# Altium PCB MB1137.PcbDoc
Units mil, origin at the board's own origin, x right, y up, seen from the top; angles counter-clockwise.
Board outline 6267 x 8240 mil, 6 copper layers (Top Layer, GND, Signal, PWR, GND (Mid2), Bottom Layer), stack 74.545 mil thick; 39 components, 109 nets, 405 pads, 144 vias.
Unrouted connection lines stored in the file: 3.
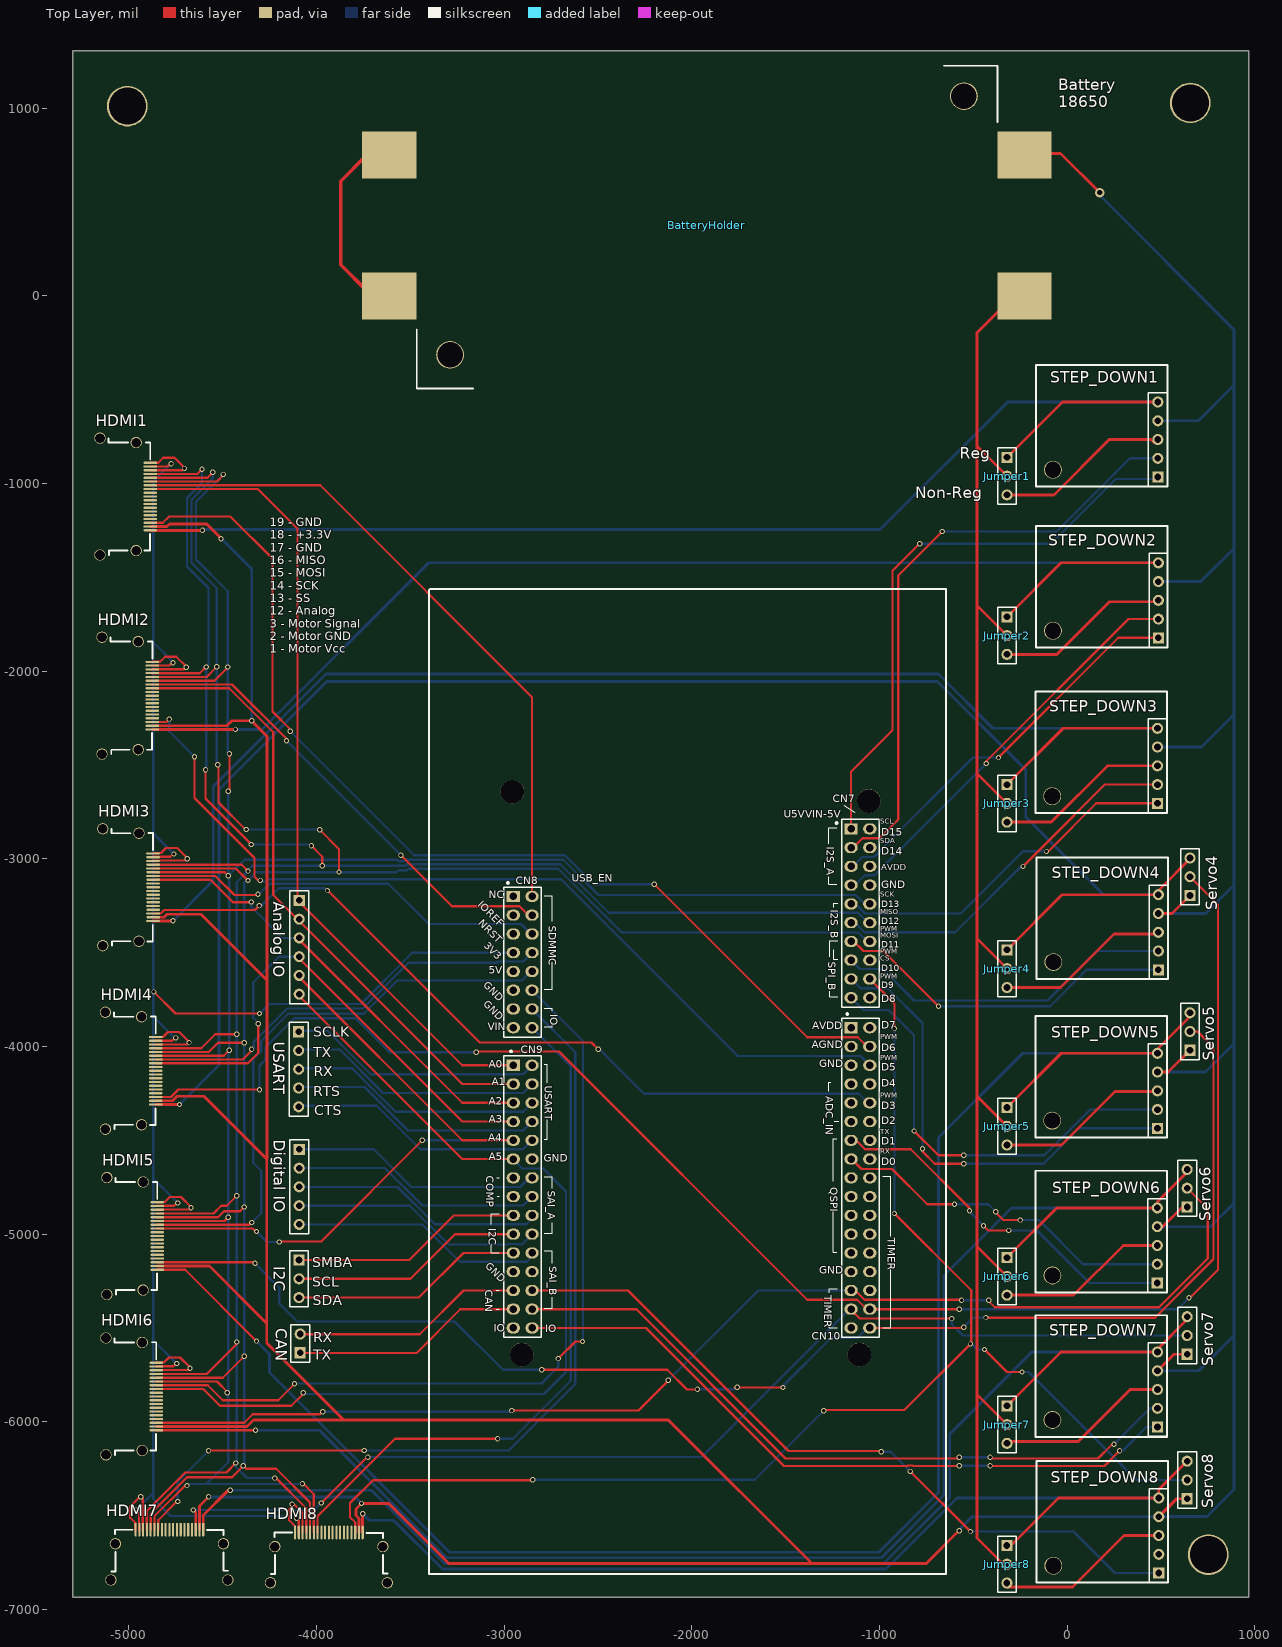
[diagram p0: Top Layer view]
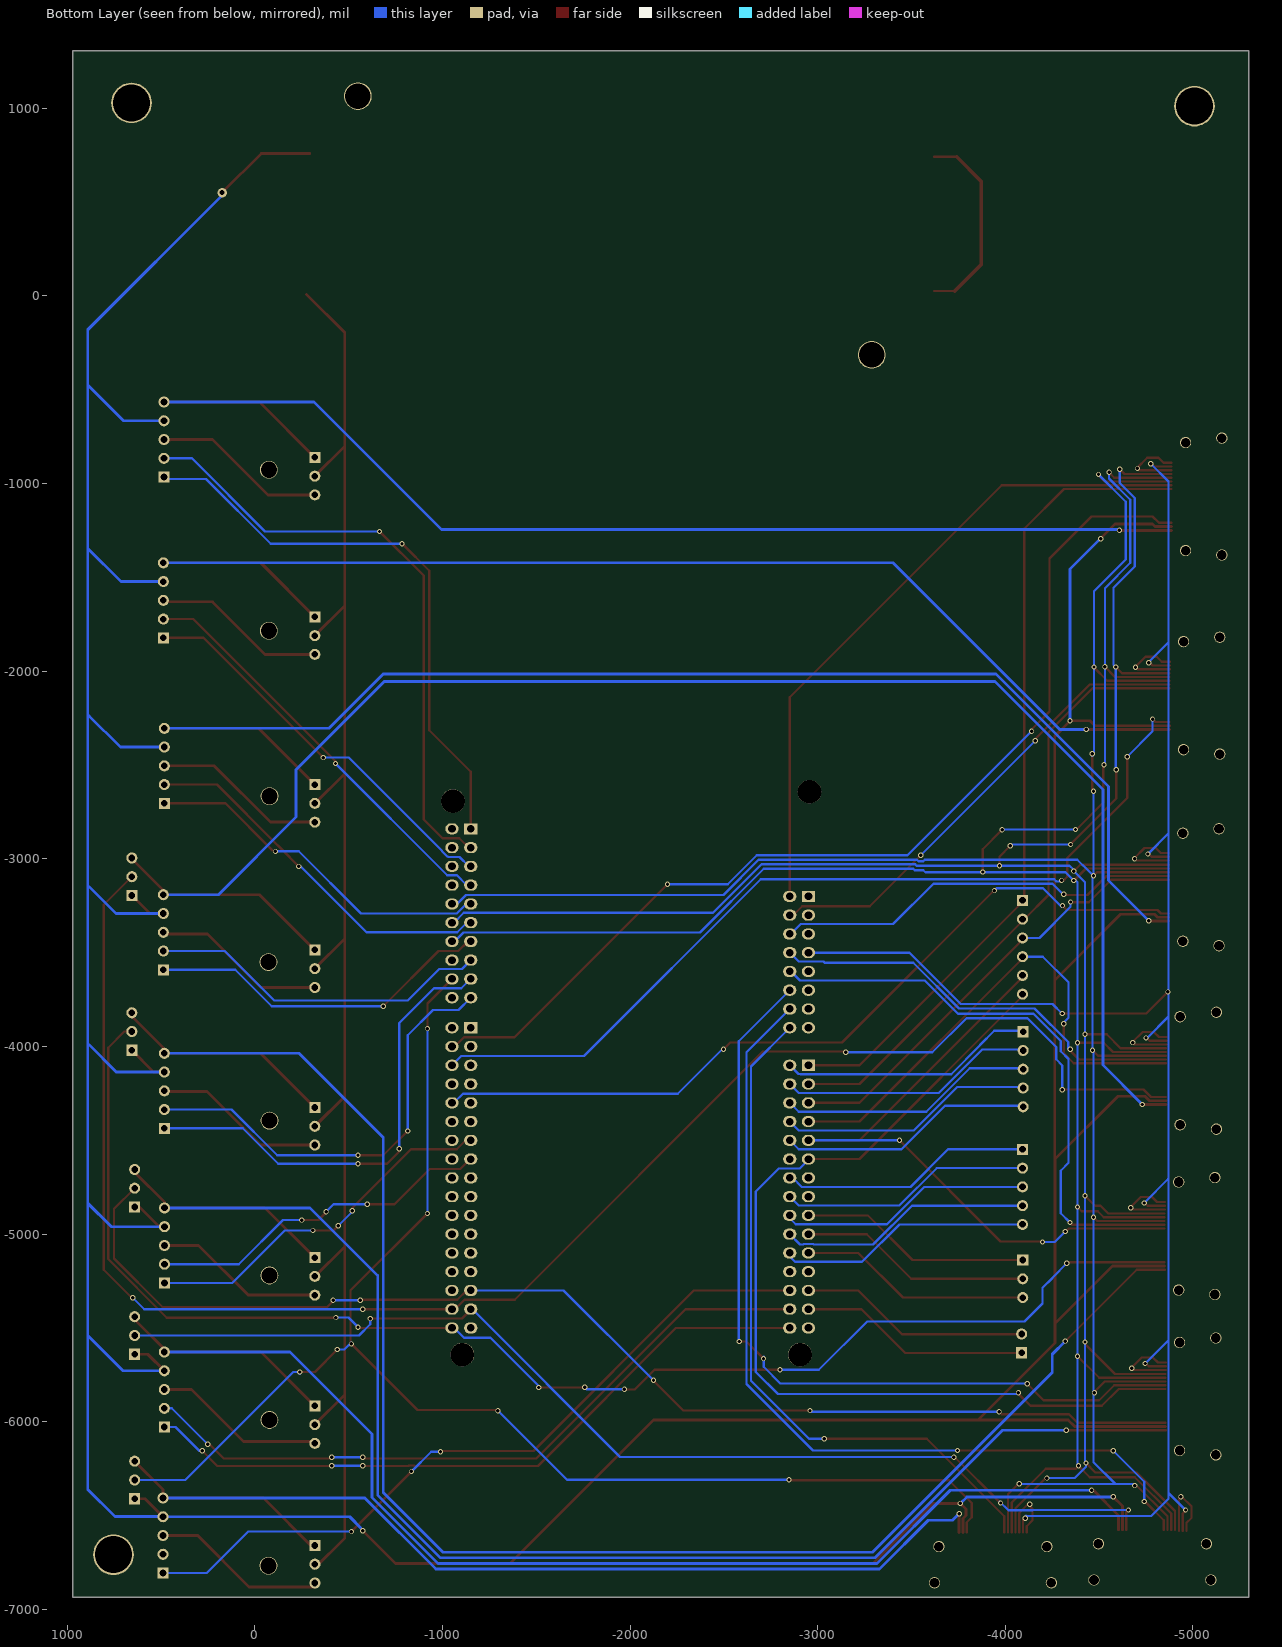
[diagram p1: Bottom Layer view, seen from below]

## Layer stack, top to bottom
Top Solder: solder mask 0.4, Solder Resist, Dk 3.5
Top Layer: signal copper 1.4
Dielectric1: core 15.748, FR-4, Dk 4.8
GND: signal copper 1.4
Dielectric2: prepreg 9.4488, FR-4, Dk 4.8
Signal: signal copper 1.4
Dielectric4: core 12.6, FR-4, Dk 4.8
PWR: signal copper 1.4
Dielectric5: prepreg 12.6, FR-4, Dk 4.8
GND (Mid2): signal copper 1.4
Dielectric3: core 15.748, FR-4, Dk 4.8
Bottom Layer: signal copper 1.4
Bottom Solder: solder mask 0.4, Solder Resist, Dk 3.5

## Board outline
-5298,-6934 -5298,1306 969,1306 969,-6934

## Design rules (kind name [scope] priority, off if disabled: settings)
Clearance Motors [(InNet('REG-GND') AND InNet('REG-VIN') AND InNet('REG-VOUT') AND InNet('VIN'))] p1: gap=18
Clearance AllOthers [All] p2: gap=12
DiffPairsRouting [All] p1: maxlimit=10 minlimit=8.9 mostfreqgap=8.9 toplayer_minwidth=15 toplayer_maxwidth=15 toplayer_prefwidth=15 midlayer1_minwidth=15 midlayer1_maxwidth=15 midlayer1_prefwidth=15 midlayer2_minwidth=15 midlayer2_maxwidth=15 midlayer2_prefwidth=15 midlayer3_minwidth=15 midlayer3_maxwidth=15 midlayer3_prefwidth=15 midlayer4_minwidth=15 midlayer4_maxwidth=15 midlayer4_prefwidth=15 bottomlayer_minwidth=15 bottomlayer_maxwidth=15 bottomlayer_prefwidth=15 maxuncoupledlength=500
FabricationTestPointUsage TestPointUsage [All] p1: valid=0 allowmultiple=FALSE
FabricationTestpoint Testpoint [(IsPad And (OnTopLayer Or OnBottomLayer))] p1: side=3 testpointundercomponent=TRUE minsize=40 maxsize=100 preferedsize=60 minholesize=0 maxholesize=40 preferedholesize=32 testpointgrid=1 allowsidetop=TRUE allowsidebottom=TRUE usegrid=TRUE gridtolerance=0.01
HoleSize [All] p1: absolutevalues=TRUE maxlimit=150 minlimit=1 maxpercent=80.000 minpercent=20.000
MinimumSolderMaskSliver [All] p1: minsoldermaskwidth=0.5
PolygonConnect VBAT [(ObjectKind = 'Poly') And (Net = 'VBAT')] p1: connectstyle=Direct reliefconductorwidth=10 reliefentries=4 polygonreliefangle="90 Angle" airgapwidth=10
PolygonConnect VDD [(ObjectKind = 'Poly') And (Net = 'VDD')] p2: connectstyle=Direct reliefconductorwidth=10 reliefentries=4 polygonreliefangle="90 Angle" airgapwidth=10
PolygonConnect VIN [(ObjectKind = 'Poly') And (Net = 'VIN')] p3: connectstyle=Direct reliefconductorwidth=10 reliefentries=4 polygonreliefangle="90 Angle" airgapwidth=10
PolygonConnect +3V3 [(ObjectKind = 'Poly') And (Net = '+3V3')] p4: connectstyle=Direct reliefconductorwidth=10 reliefentries=4 polygonreliefangle="90 Angle" airgapwidth=10
PolygonConnect E5V [(ObjectKind = 'Poly') And (Net = 'E5V')] p5: connectstyle=Direct reliefconductorwidth=10 reliefentries=4 polygonreliefangle="90 Angle" airgapwidth=10
PolygonConnect +5V [(ObjectKind = 'Poly') And (Net = '+5V')] p6: connectstyle=Direct reliefconductorwidth=10 reliefentries=4 polygonreliefangle="90 Angle" airgapwidth=10
PolygonConnect U5V [(ObjectKind = 'Poly') And (Net = 'NetC17_2')] p7: connectstyle=Direct reliefconductorwidth=10 reliefentries=4 polygonreliefangle="90 Angle" airgapwidth=10
PolygonConnect VIA [IsVia] p8: connectstyle=Direct reliefconductorwidth=20 reliefentries=4 polygonreliefangle="90 Angle" airgapwidth=10
PolygonConnect [All] p9: connectstyle=Relief reliefconductorwidth=10 reliefentries=4 polygonreliefangle="90 Angle" airgapwidth=10
RoomDefinition MB1137 [InComponentClass('MB1137')] p1: confinementstyle=ConfineIn formatcopy=TRUE lockcomponents=FALSE outline -55778.27,-43604.15 -53778.27,-43604.15 -53778.27,-42604.15 -55778.27,-42604.15
RoutingLayers [All] p1: top layer_v5=FALSE mid layer 1_v5=FALSE mid layer 2_v5=FALSE mid layer 3_v5=FALSE mid layer 4_v5=FALSE bottom layer_v5=FALSE
RoutingVias [All] p1: holewidth=12 width=20 viastyle="Through Hole" minholewidth=8 minwidth=15 maxholewidth=28 maxwidth=50
SilkToSilkClearance [All] p1: silktosilkclearance=4
SilkToSolderMaskClearance SilkscreenOverComponentPads [IsPad] p1: minsilkscreentomaskgap=4 clearancetoexposedcopper=TRUE
SolderMaskExpansion [All] p1: expansion=4
Width Width_2 [(InNet('REG-GND') OR InNet('REG-VIN') OR InNet('REG-VOUT') OR InNet('VIN'))] p1: maxlimit=18 minlimit=15 preferedwidth=15
Width [All] p2: maxlimit=12 minlimit=12 preferedwidth=12
22 further rules are at their usual default settings.

## Components (designator, comment, footprint, x,y, rotation, side; value= is the part's Value field where it differs from the comment)
"Analog IO" "Header 6" HDR1X6 -4092,-3221 r270 top
BatteryHolder "BatteryHolder" SOIC127P370X135-2N -226,752 r180 top
CAN "Header 2" HDR1X2 -4087,-5632 r90 top
CN7 "Header 10X2_Female" HDR_10x2_2R54_V_F -1151.11,-2839.85 r270 top
CN8 "Header 8X2_Female" HDR_8x2_2R54_V_F -2951.11,-3199.85 r270 top
CN9 "Header 15X2_Female" HDR_15x2_2R54_V_F -2951.11,-4099.85 r270 top
CN10 "Header 17X2_Female" HDR_17x2_2R54_V_F -1151.11,-3899.85 r270 top
"Digital IO" "Header 5" HDR1X5 -4092,-4548 r270 top
HDMI1 "HDMI_Connector" HDMI-CONNECTOR -4886,-1248 r90 top
HDMI2 "HDMI_Connector" HDMI-CONNECTOR -4875,-2309 r90 top
HDMI3 "HDMI_Connector" HDMI-CONNECTOR -4871,-3330 r90 top
HDMI4 "HDMI_Connector" HDMI-CONNECTOR -4857,-4308 r90 top
HDMI5 "HDMI_Connector" HDMI-CONNECTOR -4849,-5189 r90 top
HDMI6 "HDMI_Connector" HDMI-CONNECTOR -4854,-6044 r90 top
HDMI7 "HDMI_Connector" HDMI-CONNECTOR -4605,-6575 r180 top
HDMI8 "HDMI_Connector" HDMI-CONNECTOR -3755,-6590 r180 top
I2C "Header 3" HDR1X3 -4093,-5138 r270 top
Jumper1 "Header 3" HDR1X3 -320,-860 r270 top
Jumper2 "Header 3" HDR1X3 -320,-1710 r270 top
Jumper3 "Header 3" HDR1X3 -320,-2604 r270 top
Jumper4 "Header 3" HDR1X3 -320,-3485 r270 top
Jumper5 "Header 3" HDR1X3 -320,-4325 r270 top
Jumper6 "Header 3" HDR1X3 -320,-5125 r270 top
Jumper7 "Header 3" HDR1X3 -320,-5915 r270 top
Jumper8 "Header 3" HDR1X3 -320.48,-6659 r270 top
Servo4 "Header 3" HDR1X3 655,-3195 r90 top
Servo5 "Header 3" HDR1X3 655,-4020 r90 top
Servo6 "Header 3" HDR1X3 640,-4855 r90 top
Servo7 "Header 3" HDR1X3 640,-5640 r90 top
Servo8 "Header 3" HDR1X3 640,-6410 r90 top
STEP_DOWN1 "Header 5" HDR1X5 484,-965 r90 top
STEP_DOWN2 "Header 5" HDR1X5 487,-1822 r90 top
STEP_DOWN3 "Header 5" HDR1X5 482,-2704 r90 top
STEP_DOWN4 "Header 5" HDR1X5 487,-3591 r90 top
STEP_DOWN5 "Header 5" HDR1X5 482,-4436 r90 top
STEP_DOWN6 "Header 5" HDR1X5 481,-5260 r90 top
STEP_DOWN7 "Header 5" HDR1X5 482,-6028 r90 top
STEP_DOWN8 "Header 5" HDR1X5 489,-6806 r90 top
USART "Header 5" HDR1X5 -4095,-3921 r270 top

## Footprints (in the part's own frame and the unit in brackets; to place one, negate y for a bottom-side part, rotate by r counter-clockwise, add the part's x,y. Pads: shape width x height; smd on the part's side, far side on the other; paste and mask are expansions set on the pad)
HDMI-CONNECTOR [mm] "SQFP, 38-Leads, Body 14.00x14.00mm, Pitch 0.50mm, IPC Medium Density"
  round 1.524 hole 1.3: h1(-2.765,1.905) h1(11.859,1.905) h2(-3.365,6.807) h2(12.459,6.807)
  oval 0.3x1.85 smd: hdmi_1(-0.025,0) hdmi_2(0.483,0) hdmi_3(0.991,0) hdmi_4(1.499,0) hdmi_5(2.007,0) hdmi_6(2.515,0) hdmi_7(3.023,0) hdmi_8(3.531,0) hdmi_9(4.039,0) hdmi_10(4.547,0) hdmi_11(5.055,0) hdmi_12(5.563,0) hdmi_13(6.071,0) hdmi_14(6.579,0) hdmi_15(7.087,0) hdmi_16(7.595,0) hdmi_17(8.103,0) hdmi_18(8.611,0) hdmi_19(9.119,0)
  silkscreen extent -3.38,0 12.42,5.64
HDR1X2 [mm] "Connector; Header; 2 Position"
  rect 1.5x1.5 hole 0.9: 1(0,0)
  round 1.5 hole 0.9: 2(2.54,0)
  silkscreen extent -1.27,-1.27 3.81,1.27
HDR1X3 [mm] "Connector; Header; 3 Position"
  rect 1.5x1.5 hole 0.9: 1(0,0)
  round 1.5 hole 0.9: 2(2.54,0) 3(5.08,0)
  silkscreen extent -1.27,-1.27 6.35,1.27
HDR1X5 [mm] "Connector; Header; 5 Position"
  rect 1.5x1.5 hole 0.9: 1(0,0)
  round 1.5 hole 0.9: 2(2.54,0) 3(5.08,0) 4(7.62,0) 5(10.16,0)
  silkscreen extent -1.27,-1.27 11.43,1.27
HDR1X6 [mm] "Connector; Header; 6 Position"
  rect 1.5x1.5 hole 0.9: 1(0,0)
  round 1.5 hole 0.9: 2(2.54,0) 3(5.08,0) 4(7.62,0) 5(10.16,0) 6(12.7,0)
  silkscreen extent -1.27,-1.27 13.97,1.27
HDR_8x2_2R54_V_F [mm] "Female Header, Pitch 2.54mm, 2x8 Position, Mated Height 6mm, Tail Length 3mm"
  rect 1.5x1.8 hole 1.02: 1(0,0)
  oval 1.5x1.8 hole 1.02: 2(0,2.54) 3(2.54,0) 4(2.54,2.54) 5(5.08,0) 6(5.08,2.54) 7(7.62,0) 8(7.62,2.54) 9(10.16,0) 10(10.16,2.54) 11(12.7,0) 12(12.7,2.54) 13(15.24,0) 14(15.24,2.54) 15(17.78,0) 16(17.78,2.54)
  silkscreen extent -1.96,-1.27 19.05,3.81, body extent -1.27,-1.27 19.05,3.81, height 8.64
HDR_10x2_2R54_V_F [mm] "Female Header, Pitch 2.54mm, 2x8 Position, Mated Height 6mm, Tail Length 3mm"
  rect 1.5x1.8 hole 1.02: 1(0,0)
  oval 1.5x1.8 hole 1.02: 2(0,2.54) 3(2.54,0) 4(2.54,2.54) 5(5.08,0) 6(5.08,2.54) 7(7.62,0) 8(7.62,2.54) 9(10.16,0) 10(10.16,2.54) 11(12.7,0) 12(12.7,2.54) 13(15.24,0) 14(15.24,2.54) 15(17.78,0) 16(17.78,2.54) 17(20.32,0) 18(20.32,2.54) 19(22.86,0) 20(22.86,2.54)
  silkscreen extent -1.27,-2.09 24.13,3.81, body extent -1.27,-1.27 24.13,3.81, height 8.64
HDR_15x2_2R54_V_F [mm] "Female Header, Pitch 2.54mm, 2x15 Position, Mated Height 6mm, Tail Length 3mm"
  rect 1.5x1.8 hole 1.02: 1(0,0)
  oval 1.5x1.8 hole 1.02: 2(0,2.54) 3(2.54,0) 4(2.54,2.54) 5(5.08,0) 6(5.08,2.54) 7(7.62,0) 8(7.62,2.54) 9(10.16,0) 10(10.16,2.54) 11(12.7,0) 12(12.7,2.54) 13(15.24,0) 14(15.24,2.54) 15(17.78,0) 16(17.78,2.54) 17(20.32,0) 18(20.32,2.54) 19(22.86,0) 20(22.86,2.54) 21(25.4,0) 22(25.4,2.54) 23(27.94,0) 24(27.94,2.54) 25(30.48,0) 26(30.48,2.54) 27(33.02,0) 28(33.02,2.54) 29(35.56,0) 30(35.56,2.54)
  silkscreen extent -2.01,-1.27 36.83,3.81, body extent -1.27,-1.27 36.83,3.81, height 8.64
HDR_17x2_2R54_V_F [mm] "Female Header, Pitch 2.54mm, 2x17 Position, Mated Height 6mm, Tail Length 3mm"
  rect 1.5x1.8 hole 1.02: 1(0,0)
  oval 1.5x1.8 hole 1.02: 2(0,2.54) 3(2.54,0) 4(2.54,2.54) 5(5.08,0) 6(5.08,2.54) 7(7.62,0) 8(7.62,2.54) 9(10.16,0) 10(10.16,2.54) 11(12.7,0) 12(12.7,2.54) 13(15.24,0) 14(15.24,2.54) 15(17.78,0) 16(17.78,2.54) 17(20.32,0) 18(20.32,2.54) 19(22.86,0) 20(22.86,2.54) 21(25.4,0) 22(25.4,2.54) 23(27.94,0) 24(27.94,2.54) 25(30.48,0) 26(30.48,2.54) 27(33.02,0) 28(33.02,2.54) 29(35.56,0) 30(35.56,2.54) 31(38.1,0) 32(38.1,2.54) 33(40.64,0) 34(40.64,2.54)
  silkscreen extent -1.98,-1.27 41.91,3.81, body extent -1.27,-1.27 41.91,3.81, height 8.64
SOIC127P370X135-2N [mm] "SOIC, 2-Leads, Body 1.55x2.70mm, Pitch 1.27mm, IPC Medium Density"
  round 3.75 hole 3.45: 1(8.22,-7.95) 1(77.78,27.06)
  rect 7.34x6.35 smd: 1n(0,0) 1p(0,19.11) intcc(86,0) intcc(86,19.11)
  Top Layer lines w0.3: 89.281,0.254 86.233,0.254 ; 89.027,18.415 86.233,18.415
  Top Layer lines w0.5: 89.281,0.254 92.583,3.556 92.583,14.859 89.027,18.415
  silkscreen extent 3.68,-12.06 82.3,31.62

## Part data
"Analog IO": "Header, 6-Pin"
CAN: "Header, 2-Pin"
CN7: "Header, 10-Pin, Dual row,female"
CN8: "Header, 8-Pin, Dual row,female"
CN9: "Header, 15-Pin, Dual row,female"
CN10: "Header, 17-Pin, Dual row,female"
"Digital IO" STEP_DOWN1 STEP_DOWN2 STEP_DOWN3 STEP_DOWN4 STEP_DOWN5 STEP_DOWN6 STEP_DOWN7 STEP_DOWN8 USART: "Header, 5-Pin"
I2C Jumper1 Jumper2 Jumper3 Jumper4 Jumper5 Jumper6 Jumper7 Jumper8 Servo4 Servo5 Servo6 Servo7 Servo8: "Header, 3-Pin"

## Free pads (board coordinates)
  round 125.98 hole 125.98 unplated: 0(-2956.38,-2642) 0(-2906.38,-5642) 0(-1106.38,-5642) 0(-1056.38,-2692)
  round 95 hole 86: 2(-79,-4395) 2(-79,-2666) 2(-78,-5990) 2(-78,-5220) 2(-75,-1784) 2(-75,-926) 2(-73,-6767) 2(-73,-3550)
  round 216.54 hole 196.85: 3(-5008,1012) 3(657,1029) 3(753,-6708)

## Via types
v1: diameter 28, hole 18, Top Layer to Bottom Layer, 143 vias
v2: diameter 50, hole 28, Top Layer to Bottom Layer, 1 vias

## Nets (pads, with @x,y where several pads share a name; then routed paths per layer and width w, separated by ;. In a path a pad name is that pad's centre, name@x,y a point inside that pad or via, vN(x,y) a via of type N, cw(c..) or ccw(c..) an arc to the next point about the centre after c; other vN are vias at no path point)
+3V3: CN8.7 HDMI1.hdmi_18 HDMI2.hdmi_18 HDMI3.hdmi_18 HDMI4.hdmi_18 HDMI5.hdmi_18 HDMI6.hdmi_18 HDMI7.hdmi_18 HDMI8.hdmi_18 | length 10271.3
  Top Layer w12: v1@-4960,-6475 -4946,-6489 HDMI7.hdmi_18@-4946,-6581 ; HDMI1.hdmi_18 -4794,-909 v1@-4780,-895 ; HDMI2.hdmi_18@-4876,-1969 -4784,-1969 v1@-4770,-1955 ; HDMI3.hdmi_18@-4871,-2989 -4779,-2989 v1@-4765,-2975 ; v1@-4870,-3705 -4751,-3824 v1(-4304,-3824) ; HDMI4.hdmi_18@-4861,-3969 HDMI4.hdmi_18 -4769,-3969 v1@-4755,-3955 ; HDMI6.hdmi_18@-4856,-5704 -4764,-5704 v1@-4750,-5690 ; HDMI5.hdmi_18@-4851,-4849 -4759,-4849 v1@-4745,-4835 ; HDMI8.hdmi_18 v1@-4094,-6519
  Bottom Layer w12: v1(-4961,-6470) -4870,-6379 ; v1(-4775,-894) -4870,-989 -4870,-1845 ; v1(-4765,-1954) -4765,-1950 -4870,-1845 ; v1(-4760,-2974) -4869,-2865 -4870,-2865 ; v1(-4750,-3954) -4756,-3954 -4870,-3840 ; v1(-4745,-5689) -4746,-5689 -4870,-5565 ; v1(-4740,-4834) -4869,-4705 -4870,-4705 ; v1@-4304,-3825 -4252,-3773 -3763,-3773 -3489.85,-3499.85 CN8.7 ; v1@-4112,-6502 -4778,-6502 -4870,-6410 -4870,-6379 ; -4870,-6379 -4870,-5565 ; -4870,-5565 -4870,-4705 ; -4870,-4705 -4870,-3840 ; -4870,-3840 -4870,-2865 ; -4870,-2865 -4870,-1845
  other v1: -4106,-6514 -4866.51,-3709
+5V: CN8.9
AGND: CN10.3
AVDD: CN7.6 CN10.1
GND: CN7.8 CN8.11 CN8.13 CN9.12 CN9.23 CN10.5 CN10.17 CN10.22 CN10.27 HDMI1.hdmi_17 HDMI1.hdmi_19 HDMI2.hdmi_17 HDMI2.hdmi_19 HDMI3.hdmi_17 HDMI3.hdmi_19 HDMI4.hdmi_17 HDMI4.hdmi_19 HDMI5.hdmi_17 HDMI5.hdmi_19 HDMI6.hdmi_17 HDMI6.hdmi_19 HDMI7.hdmi_17 HDMI7.hdmi_19 HDMI8.hdmi_17 HDMI8.hdmi_19 | length 3190.8
  Top Layer w12: HDMI7.hdmi_19@-4966,-6581 -4966,-6538.5 -4993,-6511.5 -4993,-6452 -4938,-6397 -4926,-6409 HDMI7.hdmi_17@-4926,-6581 ; HDMI1.hdmi_17 -4714,-929 -4702,-917 -4757,-862 -4816.5,-862 -4843.5,-889 HDMI1.hdmi_19 ; HDMI2.hdmi_17@-4876,-1989 -4704,-1989 -4692,-1977 -4747,-1922 -4806.5,-1922 -4833.5,-1949 HDMI2.hdmi_19@-4876,-1949 ; HDMI3.hdmi_17@-4871,-3009 -4699,-3009 -4687,-2997 -4742,-2942 -4801.5,-2942 -4828.5,-2969 HDMI3.hdmi_19@-4871,-2969 ; HDMI4.hdmi_17@-4861,-3989 -4689,-3989 -4677,-3977 -4732,-3922 -4791.5,-3922 -4818.5,-3949 HDMI4.hdmi_19@-4861,-3949 ; HDMI6.hdmi_17@-4856,-5724 -4684,-5724 -4672,-5712 -4727,-5657 -4786.5,-5657 -4813.5,-5684 HDMI6.hdmi_19@-4856,-5684 ; HDMI5.hdmi_17@-4851,-4869 -4679,-4869 -4667,-4857 -4722,-4802 -4781.5,-4802 -4808.5,-4829 HDMI5.hdmi_19@-4851,-4829 ; HDMI8.hdmi_19 -4114,-6556 -4145,-6525 -4145,-6465 -4120,-6440 -4074,-6486 HDMI8.hdmi_17
  other v1: -4130,-6440 -4936,-6399 -4674,-5714 -4669,-4859 -4679,-3979 -4689,-2999 -4694,-1979 -4704,-919
I0: CN9.17 I2C.1 | length 1242.9
  Top Layer w12: I2C.1@-4095.38,-5138 -3505.38,-5138 -3267.23,-4899.85 CN9.17
I1: CN9.19 I2C.2 | length 1242.9
  Top Layer w12: I2C.2@-4095.38,-5238 -3499.38,-5238 -3261.23,-4999.85 CN9.19
I2: CN9.21 I2C.3 | length 1242.9
  Top Layer w12: I2C.3@-4095.38,-5338 -3454.38,-5338 -3216.23,-5099.85 CN9.21
IOREF: CN8.3
NetCN9_13: CN9.13
NetCN9_15: CN9.15
NetCN10_11: CN10.11
NetCN10_14: CN10.14
NetCN10_16: CN10.16
NetCN10_19: CN10.19
NetCN10_21: CN10.21
NetCN10_23: CN10.23
NetHDMI2_hdmi_1: HDMI2.hdmi_1 Jumper2.1 STEP_DOWN2.5 | length 6664.1
  Top Layer w15: HDMI2.hdmi_1 v1(-4432,-2310) ; Jumper2.1 -32,-1422 STEP_DOWN2.5
  Bottom Layer w15: v1@-4440,-2310 -4290,-2310 -3402,-1422 STEP_DOWN2.5
NetHDMI3_hdmi_1: HDMI3.hdmi_1 Jumper3.1 STEP_DOWN3.5 | length 7236.6
  Top Layer w15: HDMI3.hdmi_1 v1@-4765,-3331 ; Jumper3.1 -20,-2304 STEP_DOWN3.5
  Bottom Layer w15: v1(-4765,-3330) -4550,-3115 -4550,-2615 -3950,-2015 -685,-2015 -396,-2304 STEP_DOWN3.5
NetHDMI4_hdmi_1: HDMI4.hdmi_1 Jumper4.1 Servo4.3 STEP_DOWN4.5 | length 8970.6
  Top Layer w12: STEP_DOWN4.5 STEP_DOWN4.5@487,-3168
  Top Layer w15: HDMI4.hdmi_1 v1(-4730,-4309) ; Jumper4.1 -26,-3191 STEP_DOWN4.5 ; STEP_DOWN4.5@487,-3168 Servo4.3@672.5,-2982.5
  Bottom Layer w15: v1(-4730,-4309) -4520,-4099 -4520,-2630 -3945,-2055 -690,-2055 -220,-2525 -220,-2777.22 193.78,-3191 STEP_DOWN4.5
NetHDMI5_hdmi_1: HDMI5.hdmi_1 Jumper5.1 Servo5.3 STEP_DOWN5.5 | length 9430.7
  Top Layer w12: -4770,-5190 -4700,-5190 -4320,-5570 ; STEP_DOWN5.5 STEP_DOWN5.5@482,-4013 ; Servo5.3@655,-3840 Servo5.3
  Top Layer w15: HDMI5.hdmi_1 -4770,-5190 ; Jumper5.1 -31,-4036 STEP_DOWN5.5 ; STEP_DOWN5.5@482,-4013 Servo5.3@655,-3840
  Bottom Layer w15: -4320,-5570 -4250,-5640 -4250,-5737 -3292,-6695 -1002.28,-6695 -685,-6377.72 -685,-4485 -236,-4036 STEP_DOWN5.5
NetHDMI6_hdmi_1: HDMI6.hdmi_1 Jumper6.1 Servo6.3 STEP_DOWN6.5 | length 8281.3
  Top Layer w12: STEP_DOWN6.5 481,-4829 ; Servo6.3@640,-4670 Servo6.3@640,-4640
  Top Layer w15: HDMI6.hdmi_1 v1@-4320,-6045 ; Jumper6.1 -55,-4860 STEP_DOWN6.5 ; 481,-4829 Servo6.3@640,-4670
  Bottom Layer w15: v1@-4330,-6045 -3984.43,-6045 -3304.43,-6725 -989.85,-6725 -655,-6390.15 -655,-5220 -295,-4860 STEP_DOWN6.5
  other v1: -4325,-6045
NetHDMI7_hdmi_1: HDMI7.hdmi_1 Jumper7.1 Servo7.3 STEP_DOWN7.5 | length 7207.9
  Top Layer w12: STEP_DOWN7.5 STEP_DOWN7.5@482,-5613
  Top Layer w15: HDMI7.hdmi_1 -4604,-6499 v1@-4470,-6365 ; Jumper7.1 -33,-5628 STEP_DOWN7.5 ; STEP_DOWN7.5@482,-5613 640,-5455 Servo7.3
  Bottom Layer w15: v1(-4460,-6365) -3706.85,-6365 -3316.85,-6755 -977.43,-6755 -625,-6402.57 -625,-6065 -188,-5628 STEP_DOWN7.5
NetHDMI8_hdmi_1: HDMI8.hdmi_1 Jumper8.1 Servo8.3 STEP_DOWN8.5 | length 5809.2
  Top Layer w15: HDMI8.hdmi_1 v1@-3754,-6484 ; Jumper8.1@-320,-6680 -46,-6406 STEP_DOWN8.5 489,-6361 Servo8.3
  Bottom Layer w15: v1(-3754,-6490) -3719,-6525 -3589.28,-6525 -3329.28,-6785 -965,-6785 -586,-6406 STEP_DOWN8.5
NRST: CN8.5
PA3: "Analog IO.1" CN9.1 HDMI1.hdmi_12 | length 4368.9
  Top Layer w5: -3222.53,-4099.85 -3221.38,-4101
  Top Layer w12: HDMI1.hdmi_12 -4312.5,-1029 -4101.38,-1240.12 -4101.38,-3221 -3222.53,-4099.85 CN9.1
PA4: CN7.17 STEP_DOWN5.1 | length 2520.7
  Top Layer w12: v1(-770,-4545) -770,-4560 -705,-4625 v1(-550,-4625)
  Bottom Layer w12: CN7.17 -1100.96,-3690 -955,-3690 -770,-3875 v1(-770,-4545) ; v1(-550,-4625) -125,-4625 64,-4436 STEP_DOWN5.1
PA5: CN7.10 HDMI1.hdmi_14 HDMI2.hdmi_14 HDMI3.hdmi_14 HDMI4.hdmi_14 HDMI5.hdmi_14 HDMI6.hdmi_14 HDMI7.hdmi_14 HDMI8.hdmi_14 | length 12889
  Top Layer w12: HDMI1.hdmi_14 -4530,-989 v1@-4497,-956 ; HDMI2.hdmi_14 -4543,-2050 v1@-4473,-1980 ; HDMI3.hdmi_14 -4489,-3071 v1(-4470,-3090) ; HDMI7.hdmi_14 -4864,-6504 v1@-4694.93,-6334.93 ; HDMI4.hdmi_14 -4494,-4049 v1(-4465,-4020) ; HDMI6.hdmi_14 -4530,-5785 v1@-4470,-5845 ; HDMI5.hdmi_14 -4490,-4930 v1(-4470,-4910) ; v1@-4464,-2634 v1(-4464,-2440) ; v1@-4072.5,-6327.5 -4014,-6386 HDMI8.hdmi_14
  Bottom Layer w12: v1(-4690,-6339.85) v1@-4682.15,-6332 ; v1(-4497,-951) -4642,-1096 -4642,-1404 -4473,-1573 v1(-4473,-1977) -4473,-2442 v1@-4464,-2451 ; v1@-4470,-2635 v1(-4470,-2640) v1(-4470,-3090) ; -4413,-3034.52 -4383.48,-3005 -3570.25,-3005 -3563.25,-3012 -3536.75,-3012 -3529.75,-3005 -2685,-3005 -2497.68,-3192.32 -1125.52,-3192.32 -1077.99,-3239.85 CN7.10 ; -4413,-3033 v1(-4470,-3090) ; v1(-4075,-6330) -4077,-6332 v1@-4682.15,-6332 ; v1@-4682.15,-6332 -4587,-6332 -4470,-6215 v1(-4470,-4910) -4470,-4025 v1(-4465,-4020) -4465,-3095 v1(-4470,-3090)
  other v1: -4475,-5844.85
PA6: CN7.12 HDMI1.hdmi_16 HDMI2.hdmi_16 HDMI3.hdmi_16 HDMI4.hdmi_16 HDMI5.hdmi_16 HDMI6.hdmi_16 HDMI7.hdmi_16 HDMI8.hdmi_16 | length 13096.2
  Top Layer w12: HDMI7.hdmi_16 -4904,-6475 -4699,-6270 -4480,-6270 v1@-4430,-6220 ; HDMI1.hdmi_16 -4635,-949 v1@-4610,-924 ; HDMI2.hdmi_16 -4622,-2010 v1@-4589,-1977 ; HDMI3.hdmi_16 -4399,-3031 v1(-4365,-3065) ; HDMI4.hdmi_16 -4614,-4009 -4540,-3935 v1(-4425,-3935) ; HDMI6.hdmi_16 -4585,-5745 v1@-4425,-5585 ; HDMI5.hdmi_16 -4549,-4890 -4507,-4848 -4478,-4848 v1(-4425,-4795) ; v1(-4591,-2525) -4591,-2678 v1@-4346,-2923 ; v1@-4218.44,-6296.56 -4054,-6461 HDMI8.hdmi_16 ; v1(-4027,-2930) -3969,-2988 v1(-3969,-3037)
  Bottom Layer w12: v1(-4610,-923) -4610,-996.12 -4690,-1076.12 -4690,-1442 -4576,-1556 -4576,-1965 v1(-4588,-1977) v1@-4588,-2525 ; v1(-4430,-6219.85) -4430,-6240.11 -4370.11,-6300 v1(-4221.89,-6300) ; v1@-4425,-6219.85 v1(-4425,-4795) v1(-4425,-3935) -4425,-3125 v1(-4365,-3065) ; v1@-4365,-3058.52 -4342.48,-3036 -3526.8,-3036 -3519.8,-3029 -2701,-3029 -2442.62,-3287.38 -1114,-3287.38 -1061.53,-3339.85 CN7.12 ; v1(-4348,-2923) v1@-4026,-2923
  other v1: -4425,-5575
PA15: CN7.9 STEP_DOWN3.1 | length 1880.6
  Top Layer w12: -95,-2955 156,-2704 STEP_DOWN3.1
  Bottom Layer w12: CN7.9 -1127.47,-3239.85 -1076.32,-3291 -566,-3291 -234.54,-2959.54 v1@-110,-2959.54
  other v1: -110,-2960
PB0: CN10.31 HDMI7.hdmi_3 Servo7.2 | length 5950.5
  Top Layer w12: v1(-4656.25,-6470) -4644,-6482.25 HDMI7.hdmi_3 ; v1(-3975,-6432.52) -3731,-6188.52 v1(-3726,-6188.52) ; CN10.31 -1151.11,-5403.89 -1105,-5450 v1(-615,-5450) ; Servo7.2 Servo7.2@660,-5540
  Bottom Layer w12: v1(-4656.25,-6470) -4145.25,-6470 -4143.25,-6472 -4016.5,-6472 v1@-3970,-6425.5 ; v1@-3720,-6187 -1947,-6187 -1159.85,-5399.85 CN10.31 ; v1(-615,-5450) -615,-5480.02 -555.02,-5540 Servo7.2
PB1: CN10.7
PB2: CN10.15 STEP_DOWN6.2 | length 1852.1
  Top Layer w12: CN10.15@-1148.15,-4599.85 -1095.68,-4652.32 -932.68,-4652.32 -745,-4840 v1(-600,-4840) ; v1@-380,-4885 -340,-4925 v1(-250,-4925)
  Bottom Layer w12: CN10.15 CN10.15@-1148.15,-4599.85 ; v1(-600,-4840) -420,-4840 v1(-380,-4880) ; v1@-240,-4925 -150,-4925 85,-5160 STEP_DOWN6.2
PB3: CN7.15 STEP_DOWN4.2 | length 1836.8
  Bottom Layer w12: CN7.15 -1151.11,-3540.27 -1104,-3587.38 -982.62,-3587.38 -815,-3755 -104,-3755 160,-3491 STEP_DOWN4.2
PB4: CN7.19 STEP_DOWN5.2 | length 2380.9
  Top Layer w12: v1(-815,-4450) -685,-4580 v1(-550,-4580)
  Bottom Layer w12: CN7.19 -1085.96,-3805 -950,-3805 -815,-3940 v1(-815,-4450) ; v1(-550,-4580) -120,-4580 124,-4336 STEP_DOWN5.2
PB5: CN7.13 STEP_DOWN4.1 | length 1861.4
  Top Layer w12: CN7.13@-1136.15,-3439.85 -1085,-3491 -979,-3491 v1(-685,-3785)
  Bottom Layer w12: CN7.13 CN7.13@-1136.15,-3439.85 ; v1(-685,-3785) -90,-3785 104,-3591 STEP_DOWN4.1
PB6: CN10.13 STEP_DOWN6.1 | length 1965.8
  Top Layer w12: CN10.13@-1124.23,-4499.85 -1076.7,-4547.38 -832.62,-4547.38 -520,-4860 v1(-520,-4875) ; v1@-450,-4950 -420,-4980 v1(-310,-4980)
  Bottom Layer w12: CN10.13 CN10.13@-1124.23,-4499.85 ; v1(-520,-4875) -520,-4885 -517.5,-4882.5 v1(-445,-4955) ; v1@-305,-4980 -160,-4980 120,-5260 STEP_DOWN6.1
PB8: CN7.2
PB9: CN7.4
PB10: CN10.32 HDMI4.hdmi_3 Servo4.2 | length 8836.7
  Top Layer w12: HDMI4.hdmi_3 -4776,-4269 -4736,-4229 v1@-4305,-4229 ; v1@-3146,-4026 -2708,-4026 -1385,-5349 -1118,-5349 -1067.15,-5399.85 CN10.32 v1@-575,-5399.85 ; v1@650,-5344.52 805,-5189.52 805,-3245 Servo4.2
  Bottom Layer w12: v1(-4304,-4230) -4304,-4100.94 -4271,-4067.94 -4271,-4002 -4118.38,-3849.38 -3792.62,-3849.38 -3611,-4031 v1(-3149,-4031) ; v1(-575,-5400) 589.52,-5400 v1(650,-5339.52)
PB11: CN10.34 HDMI5.hdmi_3 Servo5.2 | length 7553.5
  Top Layer w12: HDMI5.hdmi_3 v1@-4325,-5150 ; v1(-2799,-5722) -2131,-5722 -2025,-5828 v1@-1968,-5828 ; v1@-1771,-5817 v1(-1514,-5817) ; CN10.34 v1@-554.85,-5499.85 ; v1@-432.5,-5445 468.92,-5445 781,-5132.92 781,-4006 695,-3920 Servo5.2
  Bottom Layer w12: v1(-4328,-5155) -4251,-5232 -4251,-5233 -4198,-5286 -4198,-5369 -4102,-5465 -3264,-5465 -3006.01,-5722.99 v1@-2797.01,-5722.99 ; v1(-1970,-5827) -1769,-5827 v1(-1758,-5816) ; v1@-1519,-5815 -1256,-5552 -1115,-5552 -1062.85,-5499.85 CN10.34 ; v1(-550,-5495.89) -550,-5494.52 -500,-5444.52 v1(-432.5,-5444.52)
PB12: CN7.7 STEP_DOWN2.2 | length 2232.5
  Top Layer w12: v1(-430,-2491.86) -430,-2479.75 327.75,-1722 STEP_DOWN2.2
  Bottom Layer w12: CN7.7 -1129.85,-3139.85 -1077.38,-3087.38 -1025.52,-3087.38 v1(-430,-2491.86)
PB13: CN7.5 STEP_DOWN2.1 | length 2144.4
  Top Layer w12: v1(-365,-2460) 273,-1822 STEP_DOWN2.1
  Bottom Layer w12: CN7.5 -1140.85,-3039.85 -1091,-2990 -1031,-2990 -1028.38,-2987.38 -1025.52,-2987.38 -997.68,-2959.54 -997.68,-2956.68 -501,-2460 -443.4,-2460 -443.25,-2459.86 -416.75,-2459.86 -416.6,-2460 v1(-365,-2460)
PB15: CN7.3 STEP_DOWN1.2 | length 3256.1
  Top Layer w12: CN7.3@-1139.85,-2939.85 -1090,-2890 -1000,-2890 -900,-2790 -900,-1490 v1(-665,-1255)
  Bottom Layer w12: CN7.3 CN7.3@-1139.85,-2939.85 ; v1(-665,-1255) -55,-1255 335,-865 STEP_DOWN1.2
PC0: "Analog IO.2" CN9.3 HDMI2.hdmi_12 | length 3305.9
  Top Layer w12: HDMI2.hdmi_12 -4465,-2090 -4230,-2325 -4230,-2385 -4230,-3192.38 -4101.38,-3321 -3222.53,-4199.85 CN9.3
PC2: CN10.9
PC3: "Analog IO.3" CN9.5 HDMI3.hdmi_12 | length 2427.4
  Top Layer w12: HDMI3.hdmi_12 -4565,-3111 -4445,-3231 v1@-4348,-3231 ; -4101.38,-3421 -3222.53,-4299.85 CN9.5
  Bottom Layer w12: v1(-4348,-3230) -4348,-3255 -4182,-3421 -4101.38,-3421
PC6: CN7.1 STEP_DOWN1.1 | length 3080.8
  Top Layer w12: CN7.1 -1151.11,-2536.11 -930,-2315 -930,-1464 v1@-790.5,-1324.5
  Bottom Layer w12: v1(-785,-1320) -85,-1320 260,-975 474,-975 STEP_DOWN1.1
PC7: CN7.11 STEP_DOWN3.2 | length 1970.4
  Top Layer w12: v1(-235,-3040) -142,-2947 -142,-2946.75 -123.25,-2928 -123,-2928 201,-2604 STEP_DOWN3.2
  Bottom Layer w12: CN7.11 -1130.46,-3339.85 -1079.31,-3391 -596,-3391 v1@-245,-3040
PC8: CN8.2 HDMI1.hdmi_13 | length 3564.9
  Top Layer w10: -3981,-1009 -3980.5,-1008.5
  Top Layer w12: HDMI1.hdmi_13 -3981,-1009 ; -3980.5,-1008.5 -2851.11,-2137.89 CN8.2
PC9: CN8.4 HDMI2.hdmi_13 | length 2536.2
  Top Layer w12: HDMI2.hdmi_13 -4450,-2070 v1@-4155,-2365 ; v1(-3550,-2980) -3277.68,-3252.32 -2917.68,-3252.32 -2870.15,-3299.85 CN8.4
  Bottom Layer w12: v1(-4160,-2370) v1(-3550,-2980)
PC10: CN8.6 HDMI3.hdmi_13 | length 2188.4
  Top Layer w12: HDMI3.hdmi_13 -4539,-3091 -4437.62,-3192.38 v1@-4320,-3192.38
  Bottom Layer w12: v1(-4312,-3189) -4308.06,-3189 -4251.06,-3132 -3617,-3132 -3401.62,-3347.38 -2909.47,-3347.38 -2856.99,-3399.85 CN8.6
PC11: CN8.8 HDMI4.hdmi_13 | length 2261.8
  Top Layer w12: HDMI4.hdmi_13 -4393,-4069 v1@-4345,-4021
  Bottom Layer w12: v1(-4346,-4015) -4337,-4015 -4335,-4013 -4335,-3976.06 -4155.94,-3797 -3753.06,-3797 -3509.06,-3553 -3037,-3553 -3031.38,-3547.38 -2898.64,-3547.38 CN8.8
PC12: CN8.10 HDMI5.hdmi_13 | length 3129.7
  Top Layer w12: HDMI5.hdmi_13 -4357,-4950 v1(-4345,-4938)
  Bottom Layer w12: v1(-4345,-4938) -4295,-4888 -4295,-4661.75 -4337,-4619.75 -4337,-4067 -4295,-4025 -4295,-3970 -4150.38,-3825.38 -3747.5,-3825.38 -3570.12,-3648 -2906,-3648 -2857.85,-3599.85 CN8.10
PD0: CAN.2 CN9.25 | length 1241.8
  Top Layer w12: CAN.2@-4096.38,-5533 -3449.38,-5533 -3216.23,-5299.85 CN9.25
PD1: CAN.1 CN9.27 | length 1241.8
  Top Layer w12: CAN.1@-4096.38,-5633 -3466.38,-5633 -3233.23,-5399.85 CN9.27
PD2: CN8.12 HDMI6.hdmi_13 | length 4461.3
  Top Layer w12: HDMI6.hdmi_13 -4580,-5805 -4500,-5885 -4204,-5885 v1@-4116.5,-5797.5 ; v1(-2711,-5663) -2620,-5572 v1(-2582,-5572)
  Bottom Layer w12: v1(-4117,-5797) -4117,-5796 -2801,-5796 -2712,-5707 v1@-2712,-5652 ; CN8.12 -2579,-3971.96 v1@-2579,-5577
PD3: CN9.10 USART.5 | length 1365.3
  Bottom Layer w12: USART.5@-4100.38,-4316 -3678.52,-4316 -3446.52,-4548 -2899.26,-4548 CN9.10
PD4: CN9.8 USART.4 | length 1365.3
  Bottom Layer w12: USART.4@-4100.38,-4216 -3744.58,-4216 -3512.58,-4448 -2899.26,-4448 CN9.8
PD5: CN9.6 USART.3 | length 1364.8
  Bottom Layer w12: USART.3@-4100.38,-4116 -3810.64,-4116 -3579.26,-4347.38 -2898.64,-4347.38 CN9.6
PD6: CN9.4 USART.2 | length 1364.8
  Bottom Layer w12: USART.2@-4100.38,-4016 -3876.7,-4016 -3645.32,-4247.38 -2898.64,-4247.38 CN9.4
PD7: CN9.2 USART.1 | length 1365.6
  Bottom Layer w12: USART.1@-4100.38,-3916 -3941.38,-3916 -3865.38,-3992 -3865.38,-3993.38 -3711.38,-4147.38 -2908.22,-4147.38 -2906.84,-4146 -2897.26,-4146 CN9.2
PD14: CN7.16
PD15: CN7.18 HDMI8.hdmi_3 Servo8.2 | length 7454.5
  Top Layer w12: HDMI8.hdmi_3 -3794,-6536 -3821,-6509 -3821,-6433 -3699,-6311 v1@-2852,-6311 ; v1@-1300,-5937 -867,-5937 v1(-515,-5585) -510.76,-5580.76 -510.76,-5299.24 v1@-920,-4890 ; CN7.18 -920,-3770.96 v1(-920,-3904.52) ; v1@-440,-5615 -320.48,-5734.52 v1(-240,-5734.52)
  Bottom Layer w12: v1(-2847,-6309) -1664,-6309 v1(-1296,-5941) ; v1(-920,-4889.52) v1(-920,-3904.52) ; v1@-515,-5577.11 -477.59,-5614.52 v1(-440,-5614.52) ; v1@-240,-5745 -230,-5735 -205,-5735 370,-6310 Servo8.2
PE0: CN10.33
PE2: "Digital IO.1" CN9.14 | length 1349.1
  Bottom Layer w5: CN9.14@-2867.23,-4699.85 CN9.14
  Bottom Layer w12: -4097.38,-4548 -3694.38,-4548 -3494.38,-4748 -2915.38,-4748 CN9.14@-2867.23,-4699.85
PE2A: CN10.25
PE3: "Digital IO.5" CN9.22 | length 1359.6
  Bottom Layer w5: CN9.22@-2851.11,-5118.73 CN9.22
  Bottom Layer w12: -4097.38,-4948 -3436.26,-4948 -3236.88,-5147.38 -2879.76,-5147.38 CN9.22@-2851.11,-5118.73
PE4: "Digital IO.2" CN9.16 | length 1348.5
  Bottom Layer w12: -4097.38,-4648 -3634.38,-4648 -3435,-4847.38 -2898.64,-4847.38 CN9.16
PE5: "Digital IO.3" CN9.18 | length 1357.8
  Bottom Layer w5: CN9.18@-2851.11,-4915.73 CN9.18
  Bottom Layer w12: -4097.38,-4748 -3568.38,-4748 -3369,-4947.38 -2882.76,-4947.38 CN9.18@-2851.11,-4915.73
PE6: "Digital IO.4" CN9.20 | length 1357.1
  Bottom Layer w12: -4097.38,-4848 -3502.32,-4848 -3295.32,-5055 -2979.38,-5055 -2976.7,-5052.32 -2925.52,-5052.32 -2922.84,-5055 -2906.26,-5055 CN9.20
PE7: CN10.20
PE8: CN10.18
PE9: CN10.4 HDMI1.hdmi_3 | length 5495.4
  Top Layer w12: HDMI1.hdmi_3 -4819,-1209 -4785,-1175 -4459,-1175 -4235,-1399 -4235,-2215 v1@-4135,-2315 ; v1(-2200,-3134.52) -1384.52,-3950 -1115,-3950 -1065.15,-3999.85 CN10.4
  Bottom Layer w12: v1(-4140,-2319.52) -3478.52,-2981 -2675.06,-2981 -2521.06,-3135 v1@-2205,-3135
PE10: CN10.24
PE11: CN10.6 HDMI2.hdmi_3 | length 4817.5
  Top Layer w12: HDMI2.hdmi_3 -4800,-2270 v1(-4785,-2255) ; v1(-4650,-2455) -4650,-2675 -4330,-2995 -4330,-3095 -4310.48,-3114.52 v1(-4300,-3114.52)
  Bottom Layer w12: v1(-4785,-2255) -4785,-2320 v1(-4650,-2455) ; v1@-4290,-3120 -4273,-3120 -4261,-3108 -2697,-3108 -1755,-4050 -1100.96,-4050 CN10.6
PE12: CN10.26
PE13: CN10.10 HDMI3.hdmi_3 | length 4336.8
  Top Layer w12: HDMI3.hdmi_3 -4830,-3291 -4811,-3272 -4328,-3272 v1@-4307,-3251 ; v1@-3933,-3175 -3130,-3978 -2534,-3978 v1(-2498,-4014)
  Bottom Layer w12: v1(-4305,-3249) -4305,-3252 -4301,-3256 -4201,-3156 -3955,-3156 v1(-3942,-3169) ; v1@-2492,-4014 -2255,-4251 -1110,-4251 -1061.15,-4299.85 CN10.10
PE14: CN10.28
PE15: CN10.30
PF3: STEP_DOWN8.2
PF7: CN9.26 STEP_DOWN8.1 | length 3939.8
  Top Layer w12: CN9.26 -2340.15,-5299.85 -1485,-6155 v1@-995,-6155 ; v1@-830,-6270 v1(-515,-6585)
  Bottom Layer w12: v1(-990,-6159.52) -940,-6159.52 v1(-835,-6264.52) ; v1@-505,-6585 35,-6585 256,-6806 STEP_DOWN8.1
PF8: CN9.24
PF9: CN9.28 STEP_DOWN7.2 | length 3773.3
  Top Layer w12: CN9.28 -2295.15,-5399.85 -1500,-6195 v1@-575,-6195 ; v1@-410,-6195 165,-6195 240.63,-6119.37 v1(250,-6119.37)
  Bottom Layer w12: v1(-575,-6189.52) v1(-410,-6189.52) ; v1@250,-6120 442,-5928 STEP_DOWN7.2
PF12: CN7.20
PF13: CN10.2
PF14: CN10.8
PF15: CN10.12
PG0: CN9.29
PG1: CN9.30 STEP_DOWN7.1 | length 3710.6
  Top Layer w12: CN9.30 -2244.15,-5499.85 -1509,-6235 -850.74,-6235 -848.25,-6232.52 -821.75,-6232.52 -819.26,-6235 v1@-575,-6235 ; v1@-410,-6235 199.52,-6235 v1(280,-6154.52)
  Bottom Layer w12: v1(-575,-6234.52) v1(-410,-6234.52) ; 295,-6155 422,-6028 STEP_DOWN7.1
PG2: CN8.14 HDMI7.hdmi_13 | length 4710.6
  Top Layer w12: HDMI7.hdmi_13 -4844,-6524.5 v1@-4750,-6430.5 ; v1(-4575,-6154.85) -4573.01,-6152.86 v1(-3745,-6152.86)
  Bottom Layer w12: v1(-4740,-6425) -4740,-6320 v1@-4580,-6160 ; v1(-3745,-6152.86) -2974.86,-6152.86 -2621,-5799 -2621,-4029.96 CN8.14
PG3: CN8.16 HDMI8.hdmi_13 | length 3702
  Top Layer w12: -3995,-6504 -3581,-6090 v1(-3035,-6090) ; HDMI8.hdmi_13 -3994,-6504
  Bottom Layer w12: v1(-3035,-6090) -2954,-6090 -2645,-5781 -2645,-4105.96 CN8.16
R0: CN10.29 HDMI6.hdmi_3 Servo6.2 | length 6462.7
  Top Layer w12: HDMI6.hdmi_3 -4385,-6005 -4340,-5960 -3981,-5960 v1(-3967,-5946) ; v1(-2959.25,-5940.25) -2284.25,-5940.25 v1@-2124,-5780 ; CN10.29 -1129.15,-5299.85 -1079,-5350 v1@-562.02,-5350 ; v1@-420,-5355 -385,-5390 489.98,-5390 750,-5129.98 750,-4865 Servo6.2
  Bottom Layer w12: v1(-3967,-5946) -2965,-5946 v1(-2959.25,-5940.25) ; v1(-2125,-5779) -1645.85,-5299.85 CN10.29 ; v1(-562.02,-5352.02) v1(-417.5,-5352.02)
R1: CN7.14 HDMI1.hdmi_15 HDMI2.hdmi_15 HDMI3.hdmi_15 HDMI4.hdmi_15 HDMI5.hdmi_15 HDMI6.hdmi_15 HDMI7.hdmi_15 HDMI8.hdmi_15 | length 13373.4
  Top Layer w12: HDMI1.hdmi_15 -4581,-969 v1@-4553,-941 ; HDMI7.hdmi_15 -4884,-6489 -4690,-6295 -4450,-6295 -4390,-6235 -4375,-6250 -4215,-6250 -4034.5,-6430.5 ; HDMI2.hdmi_15 -4585,-2030 v1(-4531,-1976) ; HDMI3.hdmi_15 -4430,-3051 v1@-4371,-3110 ; HDMI4.hdmi_15 -4574,-4029 -4525,-3980 v1(-4385,-3980) ; HDMI6.hdmi_15 -4500,-5765 v1(-4385,-5650) ; HDMI5.hdmi_15 -4525,-4910 -4493,-4878 -4408,-4878 v1(-4385,-4855) ; v1@-4522,-2498 -4522,-2700 v1@-4375,-2847 ; HDMI8.hdmi_15 -4034,-6430.5 ; v1(-3983,-2845) -3880,-2948 v1(-3880,-3070)
  Bottom Layer w12: v1(-4553,-940) -4553,-973.06 -4666,-1086.06 -4666,-1422 -4531,-1557 v1(-4531,-1976) v1@-4531,-2498 ; v1@-4385,-6234.85 v1(-4385,-4855) v1(-4385,-3980) -4385,-3125 -4375,-3115 v1(-4365,-3115) -4321,-3071 -3574.25,-3071 -3563.25,-3060 -3516.86,-3060 -3509.86,-3053 -2712,-3053 -2372.68,-3392.32 -1112.53,-3392.32 -1065,-3439.85 CN7.14 ; v1(-4374,-2843) v1@-3985,-2843
  other v1: -4390,-6234.85 -4526,-2498
R2: "Analog IO.4" CN9.7 HDMI4.hdmi_12 | length 2771.3
  Top Layer w12: HDMI4.hdmi_12 -4365,-4089 -4311,-4035 v1(-4311,-3879) ; -4101.38,-3521 -3222.53,-4399.85 CN9.7
  Bottom Layer w12: v1(-4311,-3879) -4305,-3879 -4337,-3847 -4337,-3658 -4200,-3521 -4101.38,-3521
R3: "Analog IO.5" CN9.9 HDMI5.hdmi_12 | length 3651
  Top Layer w12: HDMI5.hdmi_12 -4340,-4970 v1@-4325,-4985 ; v1@-4192,-5039 -3975,-5039 v1(-3436,-4500) ; -4101.38,-3621 -3222.53,-4499.85 CN9.9
  Bottom Layer w12: v1(-4320,-4986) -4264,-5042 v1(-4198,-5042) ; v1@-3433.15,-4499.85 CN9.9
R4: "Analog IO.6" CN9.11 HDMI6.hdmi_12 | length 5125.8
  Top Layer w12: HDMI6.hdmi_12 -4604,-5825 -4514,-5915 -4134,-5915 v1@-4073,-5854 ; -4101.38,-3721 -3222.53,-4599.85 CN9.11
  Bottom Layer w12: v1(-4070,-5845) -4063,-5852 -2788,-5852 -2670,-5734 -2670,-4772 -2792,-4650 -2904,-4650 -2951.11,-4602.89 CN9.11
REG-GND: BatteryHolder.1n HDMI1.hdmi_2 HDMI2.hdmi_2 HDMI3.hdmi_2 HDMI4.hdmi_2 HDMI5.hdmi_2 HDMI6.hdmi_2 HDMI7.hdmi_2 HDMI8.hdmi_2 Servo4.1 Servo5.1 Servo6.1 Servo7.1 Servo8.1 STEP_DOWN1.4 STEP_DOWN2.4 STEP_DOWN3.4 STEP_DOWN4.4 STEP_DOWN5.4 STEP_DOWN6.4 STEP_DOWN7.4 STEP_DOWN8.4 | length 30292.3
  Top Layer w12: STEP_DOWN6.4 STEP_DOWN6.4@510,-4960 ; Servo6.1@615,-4855 Servo6.1 Servo6.1@640,-4840
  Top Layer w15: HDMI1.hdmi_2 -4798,-1229 -4784,-1215 -4585,-1215 v1@-4510,-1290 ; HDMI2.hdmi_2 -4477,-2290 -4451,-2264 v1(-4345,-2264) ; HDMI3.hdmi_2 -4812,-3311 -4796,-3295 -4614.85,-3295 -4265,-3644.85 ; HDMI4.hdmi_2 -4768,-4289 -4744,-4265 -4599.85,-4265 -4265,-4599.85 ; HDMI6.hdmi_2 -4370,-6025 -4335,-5990 -2125,-5990 -1360,-6755 ; HDMI5.hdmi_2 -4570.51,-5170 -4265,-5475.51 ; HDMI7.hdmi_2 -4624,-6449 v1(-4575,-6400) ; v1@-4345,-2265 -4263.5,-2346.5 -4263.5,-4598.35 -4265,-4599.85 ; -3855,-5990 -4265,-5580 -4265,-5475.51 ; HDMI8.hdmi_2 -3774,-6515 -3790,-6499 -3790,-6465 v1(-3760,-6435) -3615,-6435 -3295,-6755 -1360,-6755 ; v1(-575,-6580) -750,-6755 -1360,-6755 ; BatteryHolder.1n@-293,760 -35,760 v2(174,551) ; STEP_DOWN7.4 570,-5640 Servo7.1 ; STEP_DOWN5.4 539,-4136 Servo5.1 ; STEP_DOWN4.4 559,-3291 Servo4.1 ; STEP_DOWN8.4 585,-6410 Servo8.1 ; STEP_DOWN6.4@510,-4960 Servo6.1@615,-4855 ; -4265,-5475.51 -4265,-4599.85
  Bottom Layer w15: v1(-4575,-6400) -3795,-6400 v1(-3760,-6435) ; v1@-4510,-1290 -4345,-1455 v1(-4345,-2264) ; -565,-6565 -506,-6506 STEP_DOWN8.4 ; v2(174,551) 159,551 890,-180 890,-475 ; STEP_DOWN8.4@480,-6505 745,-6505 890,-6360 890,-5540 ; STEP_DOWN6.4 765,-4960 890,-4835 ; STEP_DOWN7.4 702,-5728 890,-5540 ; STEP_DOWN5.4 738,-4136 884,-3990 890,-3990 ; STEP_DOWN3.4 716,-2404 882.5,-2237.5 ; STEP_DOWN4.4@483,-3291 739,-3291 880,-3150 890,-3150 ; STEP_DOWN1.4 700,-665 890,-475 ; STEP_DOWN2.4 713,-1522 890,-1345 ; 840,-525 890,-475 ; 890,-5540 890,-4835 ; 890,-4835 890,-3990 ; 890,-3990 890,-3150 ; 890,-3150 890,-1345 ; 890,-1345 890,-475
  other v1: -4509,-1294
REG-VIN: BatteryHolder.1p Jumper1.2 Jumper2.2 Jumper3.2 Jumper4.2 Jumper5.2 Jumper6.2 Jumper7.2 Jumper8.2 | length 8522.7
  Top Layer w15: -480,-800 Jumper1.2 ; Jumper8.2@-320,-6780 -480,-6620 -480,-5855 ; Jumper7.2 -480,-5855 ; Jumper6.2 -480,-5065 ; Jumper5.2 -480,-4265 ; Jumper4.2 -480,-3425 ; Jumper3.2 -480,-2544 ; Jumper2.2 -480,-1650 ; BatteryHolder.1p@-276,8 -480,-196 -480,-1650 ; -480,-5855 -480,-5065 ; -480,-5065 -480,-4265 ; -480,-4265 -480,-3425 ; -480,-3425 -480,-2544 ; -480,-2544 -480,-1650
REG-VIN1: Jumper1.3 STEP_DOWN1.3 | length 915.6
  Top Layer w12: 447.94,-765 STEP_DOWN1.3@465.97,-783.03
  Top Layer w15: Jumper1.3 -70,-1060 225,-765 447.94,-765
REG-VIN2: Jumper2.3 STEP_DOWN2.3 | length 926.3
  Top Layer w12: STEP_DOWN2.3@479,-1630 STEP_DOWN2.3
  Top Layer w15: Jumper2.3 -55,-1910 225,-1630 STEP_DOWN2.3@479,-1630
REG-VIN3: Jumper3.3 STEP_DOWN3.3 | length 900.8
  Top Layer w15: Jumper3.3 -84,-2804 216,-2504 STEP_DOWN3.3@456.5,-2504
REG-VIN4: Jumper4.3 STEP_DOWN4.3 | length 918.1
  Top Layer w15: Jumper4.3 -34,-3685 251.15,-3399.85 STEP_DOWN4.3@480,-3399.85
REG-VIN5: Jumper5.3 STEP_DOWN5.3 | length 908.1
  Top Layer w15: Jumper5.3 -30,-4525 255,-4240 STEP_DOWN5.3@470,-4240
REG-VIN6: Jumper6.3 STEP_DOWN6.3 | length 910.8
  Top Layer w15: Jumper6.3 35,-5325 300,-5060 STEP_DOWN6.3
REG-VIN7: Jumper7.3 STEP_DOWN7.3 | length 920.9
  Top Layer w12: Jumper7.3 Jumper7.3@-310,-6105
  Top Layer w15: Jumper7.3@-310,-6105 60,-6105 337,-5828 STEP_DOWN7.3
REG-VIN8: Jumper8.3 STEP_DOWN8.3 | length 922.5
  Top Layer w15: Jumper8.3@-320,-6880 30,-6880 304,-6606 STEP_DOWN8.3
REG-VOUT: HDMI1.hdmi_1 Jumper1.1 STEP_DOWN1.5 | length 6570.9
  Top Layer w15: HDMI1.hdmi_1 v1(-4608,-1249) ; Jumper1.1 -25,-565 STEP_DOWN1.5
  Bottom Layer w15: v1@-4601,-1245 -996,-1245 -316,-565 STEP_DOWN1.5
VIN: CN8.15
pads on no net: BatteryHolder.1 BatteryHolder.intcc CN8.1 HDMI1.h1 HDMI1.h2 HDMI1.hdmi_4 HDMI1.hdmi_5 HDMI1.hdmi_6 HDMI1.hdmi_7 HDMI1.hdmi_8 HDMI1.hdmi_9 HDMI1.hdmi_10 HDMI1.hdmi_11 HDMI2.h1 HDMI2.h2 HDMI2.hdmi_4 HDMI2.hdmi_5 HDMI2.hdmi_6 HDMI2.hdmi_7 HDMI2.hdmi_8 HDMI2.hdmi_9 HDMI2.hdmi_10 HDMI2.hdmi_11 HDMI3.h1 HDMI3.h2 HDMI3.hdmi_4 HDMI3.hdmi_5 HDMI3.hdmi_6 HDMI3.hdmi_7 HDMI3.hdmi_8 HDMI3.hdmi_9 HDMI3.hdmi_10 HDMI3.hdmi_11 HDMI4.h1 HDMI4.h2 HDMI4.hdmi_4 HDMI4.hdmi_5 HDMI4.hdmi_6 HDMI4.hdmi_7 HDMI4.hdmi_8 HDMI4.hdmi_9 HDMI4.hdmi_10 HDMI4.hdmi_11 HDMI5.h1 HDMI5.h2 HDMI5.hdmi_4 HDMI5.hdmi_5 HDMI5.hdmi_6 HDMI5.hdmi_7 HDMI5.hdmi_8 HDMI5.hdmi_9 HDMI5.hdmi_10 HDMI5.hdmi_11 HDMI6.h1 HDMI6.h2 HDMI6.hdmi_4 HDMI6.hdmi_5 HDMI6.hdmi_6 HDMI6.hdmi_7 HDMI6.hdmi_8 HDMI6.hdmi_9 HDMI6.hdmi_10 HDMI6.hdmi_11 HDMI7.h1 HDMI7.h2 HDMI7.hdmi_4 HDMI7.hdmi_5 HDMI7.hdmi_6 HDMI7.hdmi_7 HDMI7.hdmi_8 HDMI7.hdmi_9 HDMI7.hdmi_10 HDMI7.hdmi_11 HDMI7.hdmi_12 HDMI8.h1 HDMI8.h2 HDMI8.hdmi_4 HDMI8.hdmi_5 HDMI8.hdmi_6 HDMI8.hdmi_7 HDMI8.hdmi_8 HDMI8.hdmi_9 HDMI8.hdmi_10 HDMI8.hdmi_11 HDMI8.hdmi_12
copper on no net: | length 7.1
  Top Layer w10: -2909.38,-5639 -2906.38,-5642
  Bottom Layer w12: -4112,-6502 -4110,-6500
  other v1: -4320,-5570

## Silkscreen, mask and mechanical layers (free items; w line width, h text height)
Top Overlay:
  lines w5: -3068.37,-5054.22 -3068.37,-5099.22 -3025.37,-5099.22 ; -3068.37,-4948.22 -3068.37,-4891.22 -3025.37,-4891.22 ; -3041.37,-5399.22 -3025.37,-5399.22 ; -3041.37,-5299.22 -3025.37,-5299.22 ; -3039.37,-4699.22 -3025.37,-4699.22 ; -3037.37,-4799.22 -3025.37,-4799.22 ; -2785.37,-5395.22 -2742.37,-5395.22 -2742.37,-5336.22 ; -2785.37,-5087.22 -2742.37,-5087.22 -2742.37,-5155.22 ; -2785.37,-4995.22 -2742.37,-4995.22 -2742.37,-4939.22 ; -2785.37,-4695.22 -2742.37,-4695.22 -2742.37,-4754.22 ; -2785.37,-4495.22 -2771.37,-4495.22 -2771.37,-4391.22 ; -2785.37,-4095.22 -2771.37,-4095.22 -2771.37,-4193.22 ; -2785.37,-3895.22 -2742.37,-3895.22 -2742.37,-3881.47 ; -2785.37,-3795.22 -2742.37,-3795.22 -2742.37,-3810.22 ; -2785.37,-3695.22 -2743.25,-3695.22 -2743.25,-3551.22 ; -2785.37,-3195.22 -2743.25,-3195.22 -2743.25,-3333.22 ; -1271.25,-3094.22 -1271.25,-3135.22 -1228.25,-3135.22 ; -1271.25,-2920.22 -1271.25,-2835.22 -1228.25,-2835.22 ; -1270.37,-4239.22 -1270.37,-4191.22 -1260.37,-4191.22 ; -1268.37,-5483.22 -1268.37,-5499.22 -1225.37,-5499.22 ; -1268.37,-5312.22 -1268.37,-5291.22 -1225.37,-5291.22 ; -1264.37,-3704.22 -1264.37,-3735.22 -1221.37,-3735.22 ; -1264.37,-3520.22 -1264.37,-3435.22 -1221.37,-3435.22 ; -1245.37,-4876.72 -1245.37,-5095.22 -1226.25,-5095.22 ; -1245.37,-4718.22 -1245.37,-4492.72 -1226.25,-4492.72 ; -1244.37,-3485.22 -1244.37,-3535.22 -1221.37,-3535.22 ; -1244.37,-3257.22 -1244.37,-3235.22 -1221.37,-3235.22 ; -1240.37,-4399.22 -1216.37,-4399.22 ; -1189.37,-2713.22 -1132.37,-2751.22 ; -981.37,-5499.22 -938.37,-5499.22 -938.37,-5175.22 ; -981.37,-4691.22 -938.37,-4691.22 -938.37,-5012.22
  lines w10: -3400.38,-1567 -3400.38,-6810.61 -644.47,-6810.61 -644.47,-1561 -3394.38,-1561 ; 531,-3837 -169,-3837 -169,-4485 532,-4485 ; 531,-2108 -169,-2108 -169,-2756 532,-2756 ; 532,-5432 -168,-5432 -168,-6080 533,-6080 ; 532,-4662 -168,-4662 -168,-5310 533,-5310 ; 532,-4484 532,-3837 ; 532,-2755 532,-2108 ; 533,-6079 533,-5432 ; 533,-5309 533,-4662 ; 535,-1226 -165,-1226 -165,-1874 536,-1874 ; 535,-368 -165,-368 -165,-1016 536,-1016 ; 536,-1873 536,-1226 ; 536,-1015 536,-368 ; 537,-6209 -163,-6209 -163,-6857 538,-6857 ; 537,-2992 -163,-2992 -163,-3640 538,-3640 ; 538,-6856 538,-6209 ; 538,-3639 538,-2992
  text "Battery / 18650" at -46,1007 h60
  text "Reg" at -572,-868 h60
  text "Non-Reg" at -809,-1078 h60
  text "19 - GND / 18 - +3.3V / 17 - GND / 16 - MISO / 15 - MOSI / 14 - SCK / 13 - SS / 12 - Analog / 3 - Motor Signal / 2 - Motor GND / 1 - Motor Vcc" at -4248,-1902 h45
  text "U5V" at -1510.37,-2780.22 h40
  text "VIN-5V" at -1394.37,-2780.22 h40
  text "SCL" at -995.32,-2822.22 h45
  text "D15" at -991.37,-2876.22 h40
  text "SDA" at -995.32,-2926.22 h45
  text "I2S_A" at -1280.37,-2936.22 h40 r270
  text "D14" at -991.37,-2977.22 h40
  text "AVDD" at -991.37,-3060.22 h33
  text "USB_EN" at -2640.23,-3122.22 h40
  text "GND" at -991.37,-3157.22 h40
  text "NC" at -3082.57,-3210.22 h40
  text "SCK" at -995.37,-3212.22 h45
  text "IOREF" at -3142.37,-3246.22 h40 r315
  text "D13" at -991.37,-3257.22 h35
  text "I2S_B" at -1260.37,-3272.22 h40 r270
  text "MISO" at -995.37,-3305.22 h45
  text "NRST" at -3141.37,-3345.22 h40 r315
  text "D12" at -991.37,-3348.22 h35
  text "SDMMC" at -2761.37,-3355.22 h40 r270
  text "PWM" at -995.37,-3396.22 h45
  text "MOSI" at -995.37,-3431.22 h45
  text "3V3" at -3110.37,-3465.22 h40 r315
  text "D11" at -991.37,-3473.22 h35
  text "PWM" at -995.37,-3516.22 h45
  text "SPI_B" at -1272.37,-3548.22 h40 r270
  text "CS" at -995.37,-3553.22 h45
  text "D10" at -991.37,-3598.22 h35
  text "5V" at -3082.38,-3613.22 h40
  text "PWM" at -995.37,-3648.22 h45
  text "GND" at -3113.1,-3676.09 h38 r315
  text "D9" at -991.37,-3690.22 h35
  text "D8" at -991.37,-3763.22 h40
  text "GND" at -3114.1,-3777.97 h38 r315
  text "IO" at -2755.37,-3829.22 h40 r270
  text "D7" at -991.37,-3904.22 h40
  text "AVDD" at -1357.37,-3907.22 h40
  text "VIN" at -3086.95,-3914.22 h40
  text "SCLK" at -4016,-3948 h55
  text "PWM" at -995.32,-3972.38 h45
  text "AGND" at -1361.56,-4008.22 h40
  text "D6" at -991.37,-4025.22 h40
  text "TX" at -4016,-4056 h55
  text "PWM" at -995.32,-4083.22 h45
  text "GND" at -1321.76,-4109.22 h40
  text "A0" at -3082.76,-4113.22 h40
  text "D5" at -991.37,-4130.22 h40
  text "RX" at -4014,-4159 h55
  text "A1" at -3065.62,-4205.22 h40
  text "USART" at -2783.37,-4210.22 h40 r270
  text "D4" at -991.37,-4214.22 h40
  text "RTS" at -4016,-4264 h55
  text "ADC_IN" at -1286.37,-4265.22 h40 r270
  text "PWM" at -995.32,-4284.22 h45
  text "A2" at -3082.76,-4310.22 h40
  text "D3" at -991.37,-4335.22 h40
  text "CTS" at -4012,-4367 h55
  text "A3" at -3082.76,-4406.22 h40
  text "D2" at -991.37,-4415.22 h40
  text "TX" at -995.32,-4477.22 h45
  text "A4" at -3084.67,-4505.22 h40
  text "D1" at -991.37,-4524.22 h40
  text "RX" at -995.32,-4582.97 h45
  text "A5" at -3082.76,-4607.22 h40
  text "GND" at -2789.37,-4614.22 h40
  text "D0" at -991.37,-4632.22 h40
  text "COMP" at -3095.37,-4689.22 h40 r270
  text "QSPI" at -1262.37,-4751.22 h40 r270
  text "SAI_A" at -2766.37,-4768.22 h40 r270
  text "I2C" at -3081.37,-4967.22 h40 r270
  text "TIMER" at -955.37,-5019.22 h40 r270
  text "SAI_B" at -2760.37,-5172.22 h40 r270
  text "GND" at -3104.37,-5174.22 h38 r315
  text "SMBA" at -4022,-5175 h55
  text "GND" at -1321.76,-5212.22 h40
  text "SCL" at -4022,-5279 h55
  text "CAN" at -3101.37,-5296.22 h40 r270
  text "TIMER" at -1293.87,-5325.22 h40 r270
  text "SDA" at -4019,-5378 h55
  text "IO" at -3054.15,-5521.22 h40
  text "IO" at -2780.37,-5523.22 h40
  text "RX" at -4016,-5577 h55
  text "TX" at -4016,-5668 h55